# Altium PCB placaOscilador_TP1_ASSD.PcbDoc
Units mm, origin at the board's own origin, x right, y up, seen from the top; angles counter-clockwise.
Board outline 100 x 100 mm, 2 copper layers (Top Layer, Bottom Layer); 33 components, 23 nets, 93 pads, 0 vias.
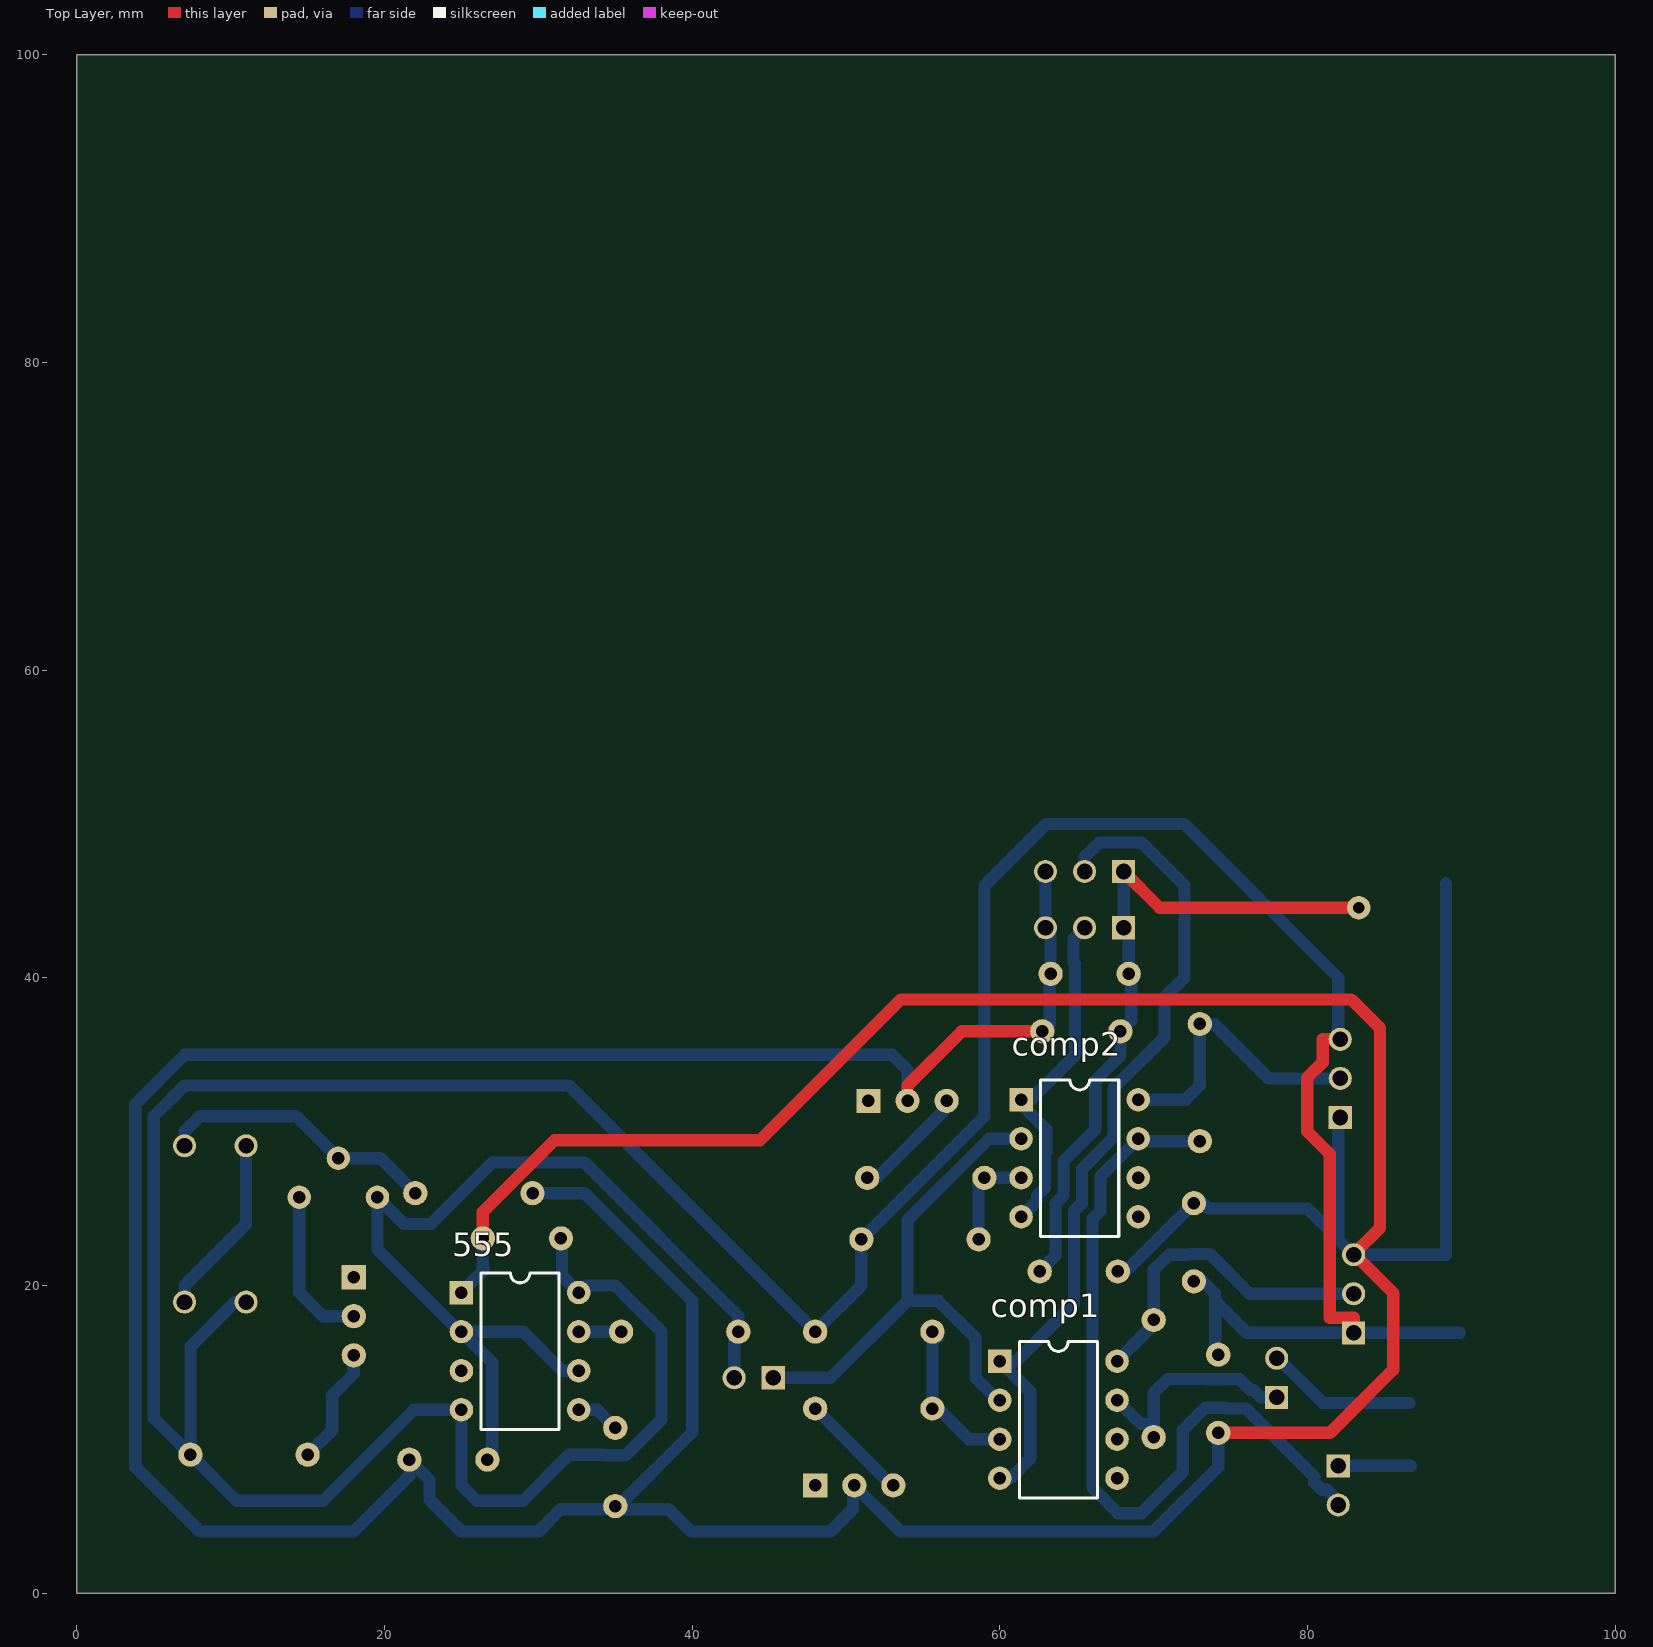
[diagram p0: Top Layer view]
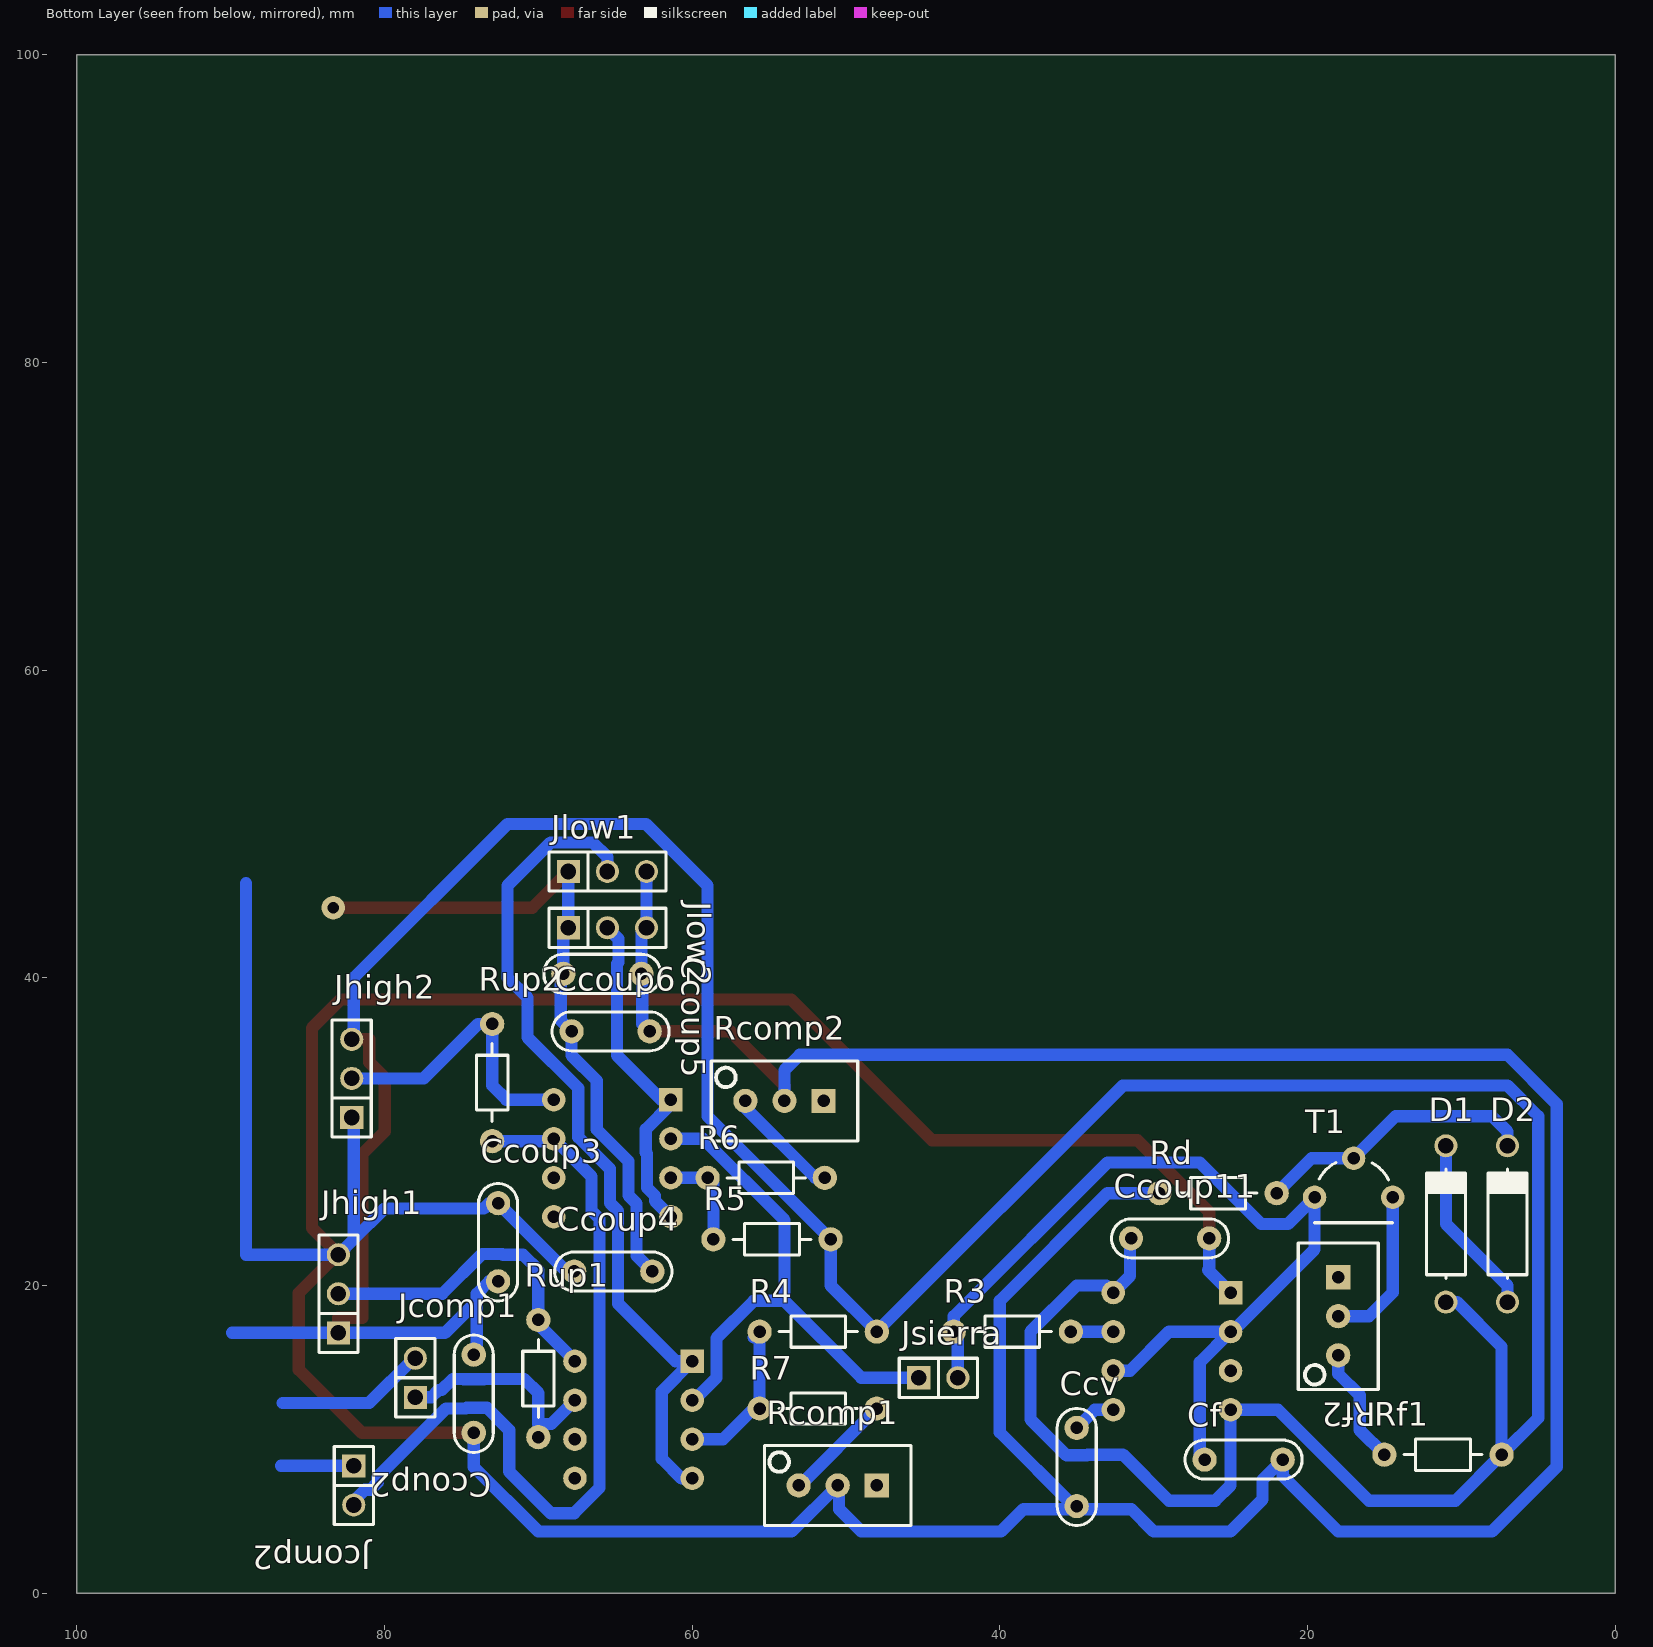
[diagram p1: Bottom Layer view, seen from below]
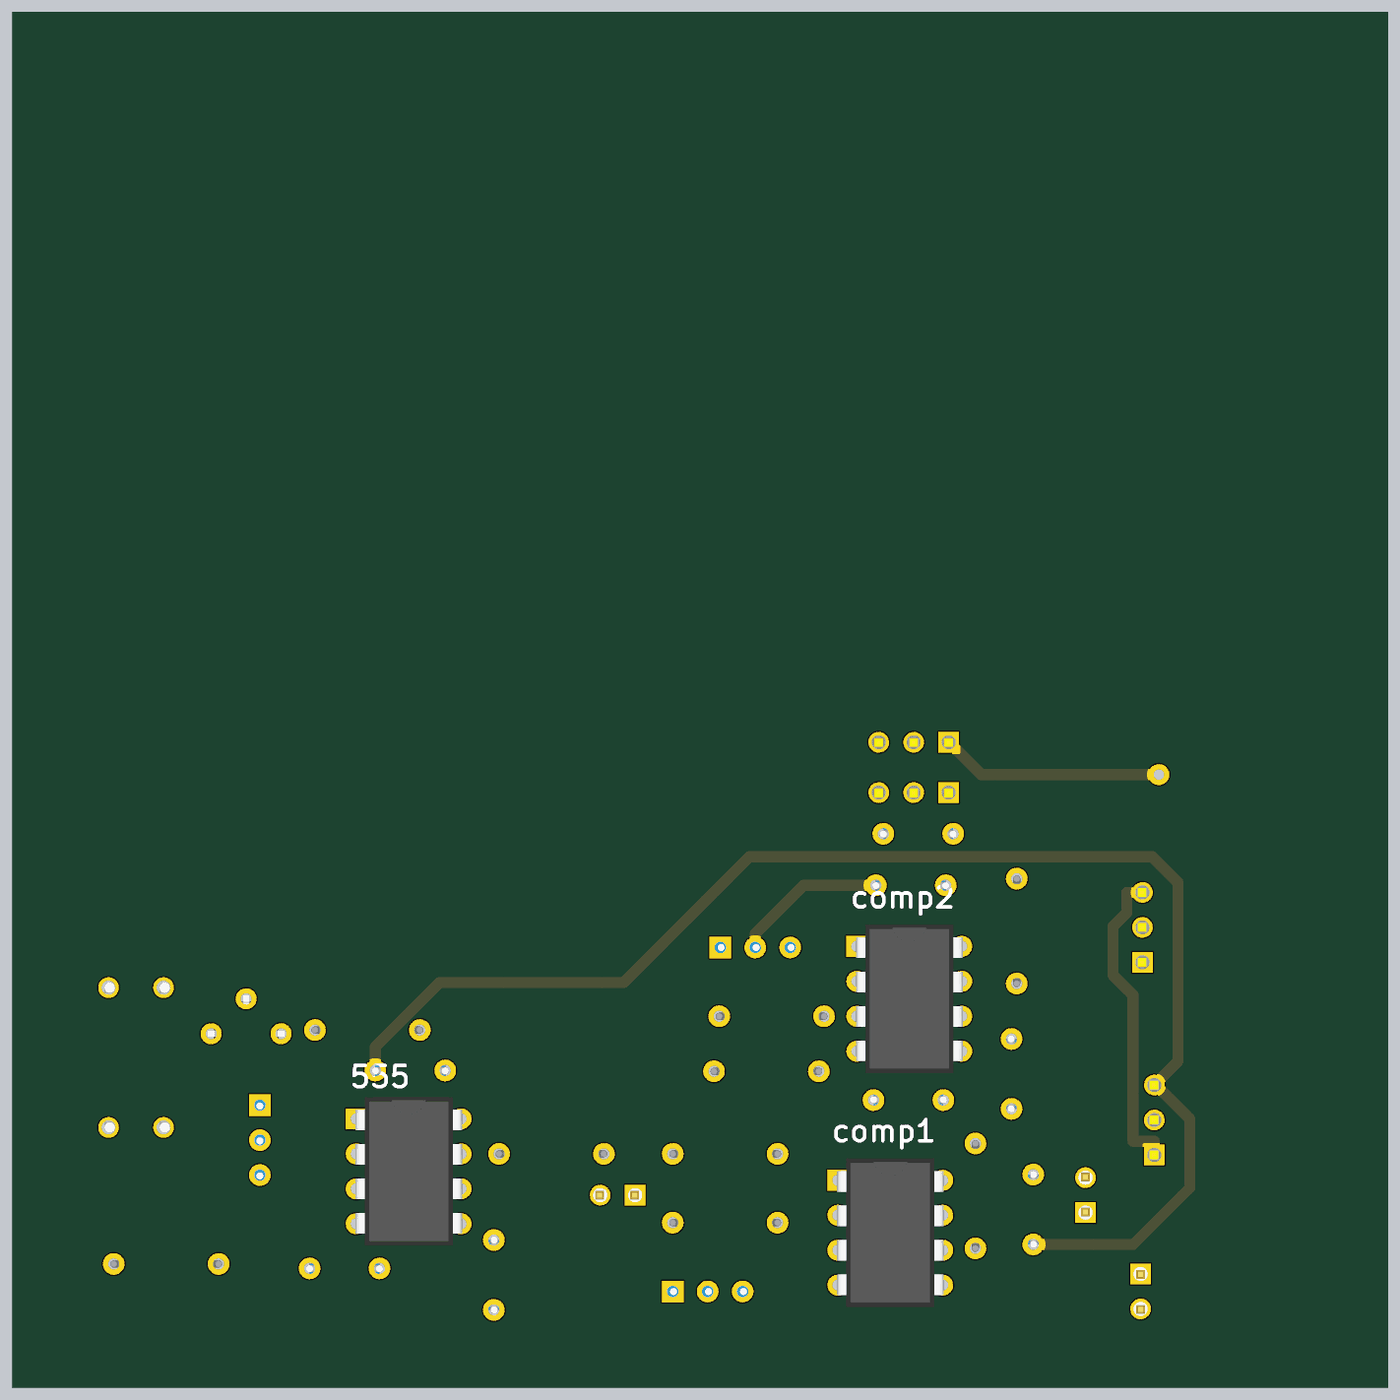
[diagram p2: 3D render of the assembled board from above, using the file's embedded part models]
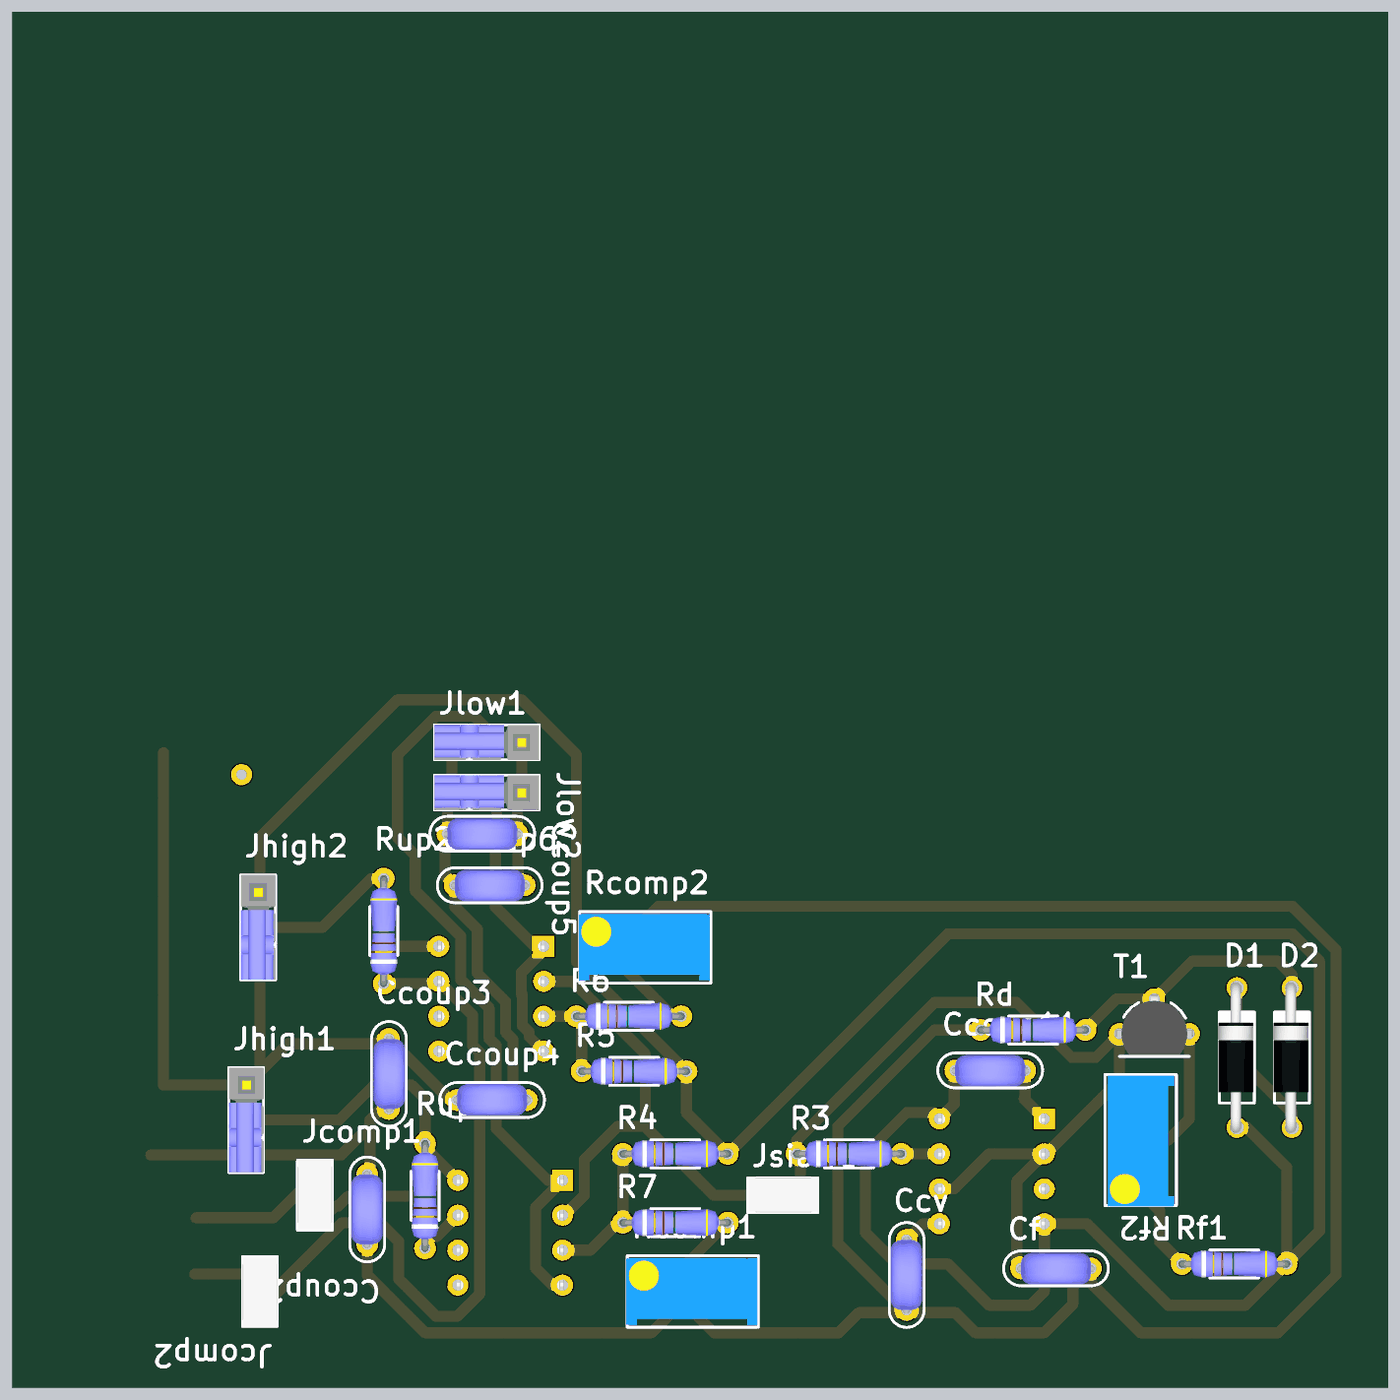
[diagram p3: 3D render of the assembled board from below, using the file's embedded part models]

## Layer stack, top to bottom
Top Solder: solder mask 0.0102, Solder Resist, Dk 3.5
Top Layer: signal copper 0.0356
Dielectric 1: dielectric 0.32, FR-4, Dk 4.8
Bottom Layer: signal copper 0.0356
Bottom Solder: solder mask 0.0102, Solder Resist, Dk 3.5

## Board outline
100,0 100,100 0,100 0,0

## Design rules (kind name [scope] priority, off if disabled: settings)
Clearance [All] p1: gap=0.4 ignorepadtopadclearanceinfootprint=FALSE
PolygonConnect [All] p1: connectstyle=Relief reliefconductorwidth=0.254 reliefentries=4 polygonreliefangle="90 Angle" airgapwidth=0.254
RoutingVias [All] p1: holewidth=0.4 width=2 viastyle="Through Hole" minholewidth=0.3 minwidth=1.8 maxholewidth=0.5 maxwidth=2
SolderMaskExpansion [All] p1: expansion=0.102
Width [All] p1: maxlimit=0.9 minlimit=0.75 preferedwidth=0.8
30 further rules are at their usual default settings.

## Components (designator, comment, footprint, x,y, rotation, side; value= is the part's Value field where it differs from the comment)
555 "LM555" DIP8 25,19.54 r0 top (schematic designator U1)
Ccoup2 "CAP" CAP200 74.2,12.96 r270 bottom
Ccoup3 "CAP" CAP200 72.62,22.81 r90 bottom
Ccoup4 "CAP" CAP200 65.13,20.91 r0 bottom
Ccoup5 "CAP" CAP200 65.84,40.26 r180 bottom
Ccoup6 "CAP" CAP200 65.3,36.52 r180 bottom
Ccoup11 "CAP" CAP200 28.93,23.06 r180 bottom
Ccv "CAP" CAP200 35,8.2 r270 bottom
Cf "CAP" CAP200 24.15,8.68 r180 bottom
comp1 "IC_DIP8" DIP8 60,15.08 r0 top (schematic designator U2)
comp2 "IC_DIP8" DIP8 61.38,32.08 r0 top (schematic designator U3)
D1 "DIODO SCHOTTKY" DO41 11,24 r90 bottom
D2 "DIODO SCHOTTKY" DO41 7,24 r90 bottom
Jcomp1 "JUMPER" JUMPER2 78,14 r90 bottom
Jcomp2 "JUMPER" JUMPER2 82,7 r270 bottom
Jhigh1 "JUMPER" JUMPER3 83,19.46 r90 bottom
Jhigh2 "JUMPER" JUMPER3 82.133,33.46 r90 bottom
Jlow1 "JUMPER" JUMPER3 65.51,46.91 r180 bottom
Jlow2 "JUMPER" JUMPER3 65.51,43.254 r180 bottom
Jsierra "JUMPER" JUMPER2 44,14 r180 bottom
R3 "RES" RES300 43,17 r180 bottom
R4 "RES" RES300 55.62,17 r180 bottom
R5 "RES" RES300 58.62,23 r180 bottom
R6 "RES" RES300 59,27 r180 bottom
R7 "RES" RES300 55.62,12 r180 bottom
Rcomp1 "PRESET" "PRESET V" 50.54,7 r0 bottom
Rcomp2 "PRESET" "PRESET V" 54,32 r0 bottom
Rd "RES" RES300 29.62,26 r180 bottom
Rf1 "RES" RES300 15,9 r180 bottom
Rf2 "PRESET" "PRESET V" 18,18 r270 bottom
Rup1 "RES" RES300 70,10.137 r90 bottom
Rup2 "RES" RES300 73,29.38 r90 bottom
T1 "TRANSISTOR PNP" TO92 17,27 r0 bottom

## Footprints (in the part's own frame and the unit in brackets; to place one, negate y for a bottom-side part, rotate by r counter-clockwise, add the part's x,y. Pads: shape width x height; smd on the part's side, far side on the other; paste and mask are expansions set on the pad)
CAP200 [mil]
  round 62 hole 32: 1(-100,0) 2(100,0)
  silkscreen extent -150,-50 150,50, body extent -110,-46 110,44, height 246
DIP8 [mil]
  rect 60x60 hole 32: 1(0,0)
  round 60 hole 32: 2(0,-100) 3(0,-200) 4(0,-300) 5(300,-300) 6(300,-200) 7(300,-100) 8(300,0)
  silkscreen extent 50,-350 250,50, body extent -3,-363 303,63, height 177
DO41 [mm]
  round 1.5 hole 1.016: 1(-5.08,0) 2(5.08,0)
  silkscreen extent -3.56,-1.27 3.56,1.27, body extent -5.46,-1.19 5.46,1.37, height 2.03
JUMPER2 [mm]
  rect 1.5x1.5 hole 1.016: 1(-1.27,0)
  round 1.5 hole 1.016: 2(1.27,0)
  silkscreen extent -2.54,-1.27 2.54,1.27, body extent -2.46,-1.27 2.54,1.27, height 9.5
JUMPER3 [mm]
  rect 1.5x1.5 hole 1.016: 1(-2.54,0)
  round 1.5 hole 1.016: 2(0,0) 3(2.54,0)
  silkscreen extent -3.81,-1.27 3.81,1.27, body extent -3.81,-1.3 3.81,1.27, height 16.15
"PRESET V" [mil]
  rect 62x62 hole 32: 1(-100,0)
  round 62 hole 32: 2(0,0) 3(100,0)
  silkscreen extent -188,-102 188,102, body extent -185,-95 190,95, height 455
RES300 [mil]
  round 62 hole 32: 1(0,0) 2(300,0)
  silkscreen extent 50,-40 250,40, body extent -10,-38 310,38, height 79
TO92 [mil]
  round 60 hole 32: 1(0,-50) 2(100,50) 3(-100,50)
  silkscreen extent -100,-39 100,115, body extent -110,-61 110,110, height 315

## Part data
555: "Timer"
Jhigh1 Jhigh2 Jlow1 Jlow2: library part JUMPER3

## Free pads (board coordinates)
  round 1.524 hole 0.762: 4(83.33,44.56)

## Nets (pads, with @x,y where several pads share a name; then routed paths per layer and width w, separated by ;. In a path a pad name is that pad's centre, name@x,y a point inside that pad or via, vN(x,y) a via of type N, cw(c..) or ccw(c..) an arc to the next point about the centre after c; other vN are vias at no path point)
-VCC: Ccoup4.1 Ccoup5.1 Ccoup6.1 Jlow1.1 Jlow2.1 pad.4 | length 44.9
  Top Layer w0.8: Jlow1.1 70.4,44.56 pad.4
  Bottom Layer w0.8: Ccoup4.1 63.62,21.94 63.62,25.334 64.142,25.856 64.142,28.076 66.2,30.134 66.2,33.317 67.84,34.957 Ccoup6.1 68.54,37.22 68.54,40.1 Ccoup5.1 68.38,42.924 Jlow2.1 Jlow1.1
comp: comp1.2 comp2.2 Jsierra.1 | length 35.8
  Bottom Layer w0.8: Jsierra.1 49,14 54,19 ; comp1.2 59.885,12.54 58.425,14 58.425,16.575 56,19 54,19 ; comp2.2 59.295,29.54 54,24.245 54,19
GND: 555.1 Ccoup2.2 Ccoup3.2 Ccoup4.2 Ccoup5.2 Ccoup6.2 Ccoup11.2 Ccv.2 Cf.2 Jhigh1.3 Jhigh2.1 Jlow1.3 Jlow2.3 Rcomp1.2 Rcomp2.2 Rd.1 | length 378.4
  Top Layer w0.8: Ccoup11.2 26.39,24.78 31.05,29.44 44.41,29.44 53.557,38.587 82.853,38.587 84.71,36.73 84.71,23.74 83,22.03 Jhigh1.3 83.09,22 85.58,19.51 85.58,14.53 81.47,10.42 Ccoup2.2 Ccoup2.2@74.2,10.26 ; Rcomp2.2 54,33 57.52,36.52 Ccoup6.2
  Bottom Layer w0.8: 555.1 26.46,21 26.39,21.07 Ccoup11.2 ; Ccoup11.2@26.46,23 Ccoup11.2@26.62,23 ; Rd.1 33,26 40,19 40,10.46 35.2,5.66 Ccv.2 ; Rcomp1.2@50.46,7 50.46,5.46 49,4 39.92,4 38.46,5.46 35.2,5.46 Ccv.2 ; Rcomp1.2 53.54,4 70,4 74.2,8.2 Ccoup2.2 ; Rcomp2.2 54,34 53,35 7,35 3.8,31.8 3.8,8.2 8,4 18,4 21.61,7.61 Cf.2 22.92,7.37 22.92,6.08 25,4 30,4 31.46,5.46 34.8,5.46 Ccv.2 ; Jlow1.3 Jlow2.3 63.3,42.924 Ccoup5.2 63.24,40.2 Ccoup6.2@63.24,37 ; Ccoup4.2 68.18,20.91 Ccoup3.2 73.19,25.35 73.54,25 80,25 82,23 ; Jhigh2.1@82,30.92 82,23 ; 89,46.15 89,22 Jhigh1.3 82,23
high1: comp1.8 Jhigh1.2 Rup1.2 | length 21.4
  Bottom Layer w0.8: comp1.8 70,17.46 Rup1.2 70,21 71,22 72.295,22 72.342,22.047 73.658,22.047 76.245,19.46 Jhigh1.2
high2: comp2.8 Jhigh2.2 Rup2.2 | length 19
  Bottom Layer w0.8: comp2.8 72.08,32.08 73,33 Rup2.2 73.92,37 77.46,33.46 Jhigh2.2
low1: comp1.1 comp1.4 Jlow1.2 | length 55.2
  Bottom Layer w0.8: comp1.4 60.7,7.46 61.97,8.73 61.97,13.11 comp1.1 61.08,15.08 64.82,18.82 64.82,24.837 65.342,25.359 65.342,27.579 67.4,29.637 67.4,32.82 70.71,36.13 70.71,38.71 72,40 72,46 69.2,48.8 66.46,48.8 65.51,47.85 Jlow1.2
low2: comp2.1 comp2.4 Jlow2.2 | length 22.3
  Bottom Layer w0.8: comp2.4 62.42,25.5 62.42,25.831 62.942,26.353 62.942,28.573 63.01,28.641 63.01,30.16 61.38,31.79 comp2.1 62.02,32.08 64.887,34.947 64.887,40.918 64.79,41.015 64.79,42.534 Jlow2.2
NetCcv_1: 555.5 Ccv.1 | length 2.9
  Bottom Layer w0.8: 555.5 33.82,11.92 Ccv.1
NetCf_1: 555.2 555.6 Cf.1 Jsierra.2 R3.1 T1.2 | length 63.1
  Bottom Layer w0.8: Cf.1 27,8.99 27,15 555.2 ; 555.6 31.54,14.46 29,17 555.2 ; Jsierra.2 42.73,16.73 R3.1 43,18 33,28 27,28 23,24 21.27,24 T1.2 19.54,22.345 24.885,17 555.2
NetD1_2: D1.2 D2.1 | length 11.8
  Bottom Layer w0.8: D2.1 7,20 11,24 D1.2
NetD2_2: D2.2 Rd.2 T1.1 | length 18.4
  Bottom Layer w0.8: D2.2 7,30 8,31 14.27,31 T1.1 19.73,28.27 Rd.2
NetJcomp1_1: comp1.7 Jcomp1.1 Rup1.1 | length 13.9
  Bottom Layer w0.8: comp1.7 69.16,11 70,11 70,13 70.92,13.92 73.535,13.92 73.542,13.913 74.858,13.913 74.865,13.92 75.57,13.92 76.29,13.2 76.497,13.2 76.967,12.73 Jcomp1.1
NetJcomp1_2: Jcomp1.2 | length 9.8
  Bottom Layer w0.8: Jcomp1.2 78.091,15.27 81,12.361 86.639,12.361
NetJcomp2_1: Jcomp2.1 | length 4.7
  Bottom Layer w0.8: Jcomp2.1 86.73,8.27
NetJcomp2_2: comp2.7 Jcomp2.2 Rup2.1 | length 52.1
  Bottom Layer w0.8: Rup2.1 69.16,29.38 comp2.7 66.542,27.082 66.542,24.862 66.02,24.34 66.02,6.851 67.671,5.2 69.2,5.2 71.9,7.9 71.9,10.605 73.342,12.047 74.658,12.047 74.705,12 76,12 80.45,7.55 80.45,7.189 80.919,6.72 81.28,6.72 82,6 Jcomp2.2
NetR3_2: 555.7 R3.2 | length 2.8
  Bottom Layer w0.8: 555.7 R3.2
NetR6_2: R6.2 Rcomp2.3 | length 7.5
  Bottom Layer w0.8: R6.2 52,27 56.54,31.54 Rcomp2.3
NetR7_2: R7.2 Rcomp1.3 | length 7.1
  Bottom Layer w0.8: R7.2 Rcomp1.3@53,7
NetRf1_1: Rf1.1 Rf2.3 | length 7.7
  Bottom Layer w0.8: Rf1.1 16.61,10.61 16.61,12.87 18,14.26 Rf2.3
NetRf2_2: Rf2.2 T1.3 | length 10.4
  Bottom Layer w0.8: T1.3 14.46,19.54 16,18 Rf2.2
VCC: 555.4 555.8 Ccoup2.1 Ccoup3.1 Ccoup11.1 D1.1 Jhigh1.1 Jhigh2.3 R4.2 R5.2 Rf1.2 | length 255.3
  Top Layer w0.8: Jhigh2.3 81,36 81,34.519 79.99,33.509 79.99,30.015 81.45,28.555 81.45,17.91 83,17.91 Jhigh1.1
  Bottom Layer w0.8: D1.1 10.28,18.92 7.38,16.02 Rf1.2 ; 555.4@24.953,11.92 21.92,11.92 16,6 10.38,6 Rf1.2 ; 555.4 25,7 26,6 29,6 32,9 34.295,9 34.342,8.953 35.658,8.953 38,11.295 38,17 35,20 33.08,20 555.8 31.54,20.62 31.54,22.99 Ccoup11.1 ; Ccoup3.1 73.19,20.27 74,19.46 74,19 ; Ccoup2.1 74,15.7 74,19 ; Jhigh2.3@82,36 82,40 72,50 63,50 59,46 59,31 R5.2 51,20 R4.2 32,33 7,33 5,31 5,11.38 Rf1.2 ; 89.92,16.92 Jhigh1.1 76.08,16.92 74,19
vref1: comp1.3 R4.1 R7.1 | length 10.7
  Bottom Layer w0.8: R4.1@56,16.62 R4.1 R7.1 56,12 58,10 comp1.3
vref2: comp2.3 R5.1 R6.1 | length 6.5
  Bottom Layer w0.8: R5.1 58.62,26.62 R6.1 comp2.3
pads on no net: 555.3 comp1.5 comp1.6 comp2.5 comp2.6 Rcomp1.1 Rcomp2.1 Rf2.1